# EAGLE board Full Side Panel V4 - Notched (EAGLE 7.3.0)
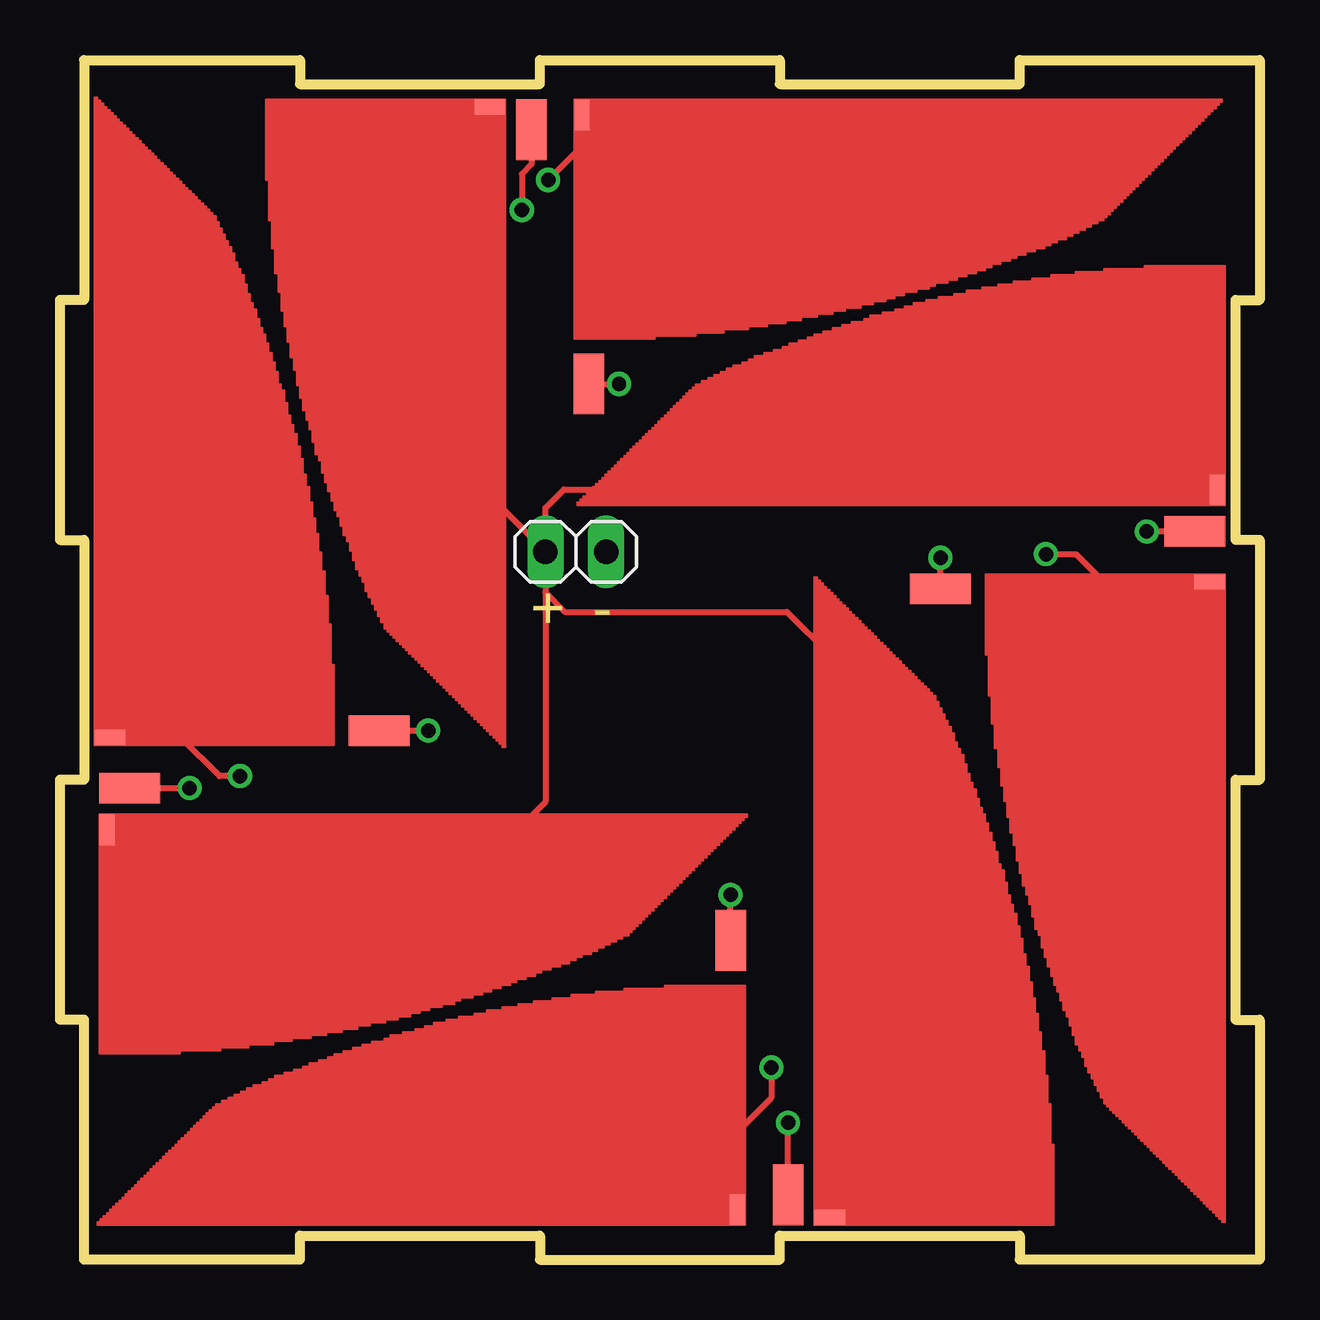
[diagram p0: board, top side]
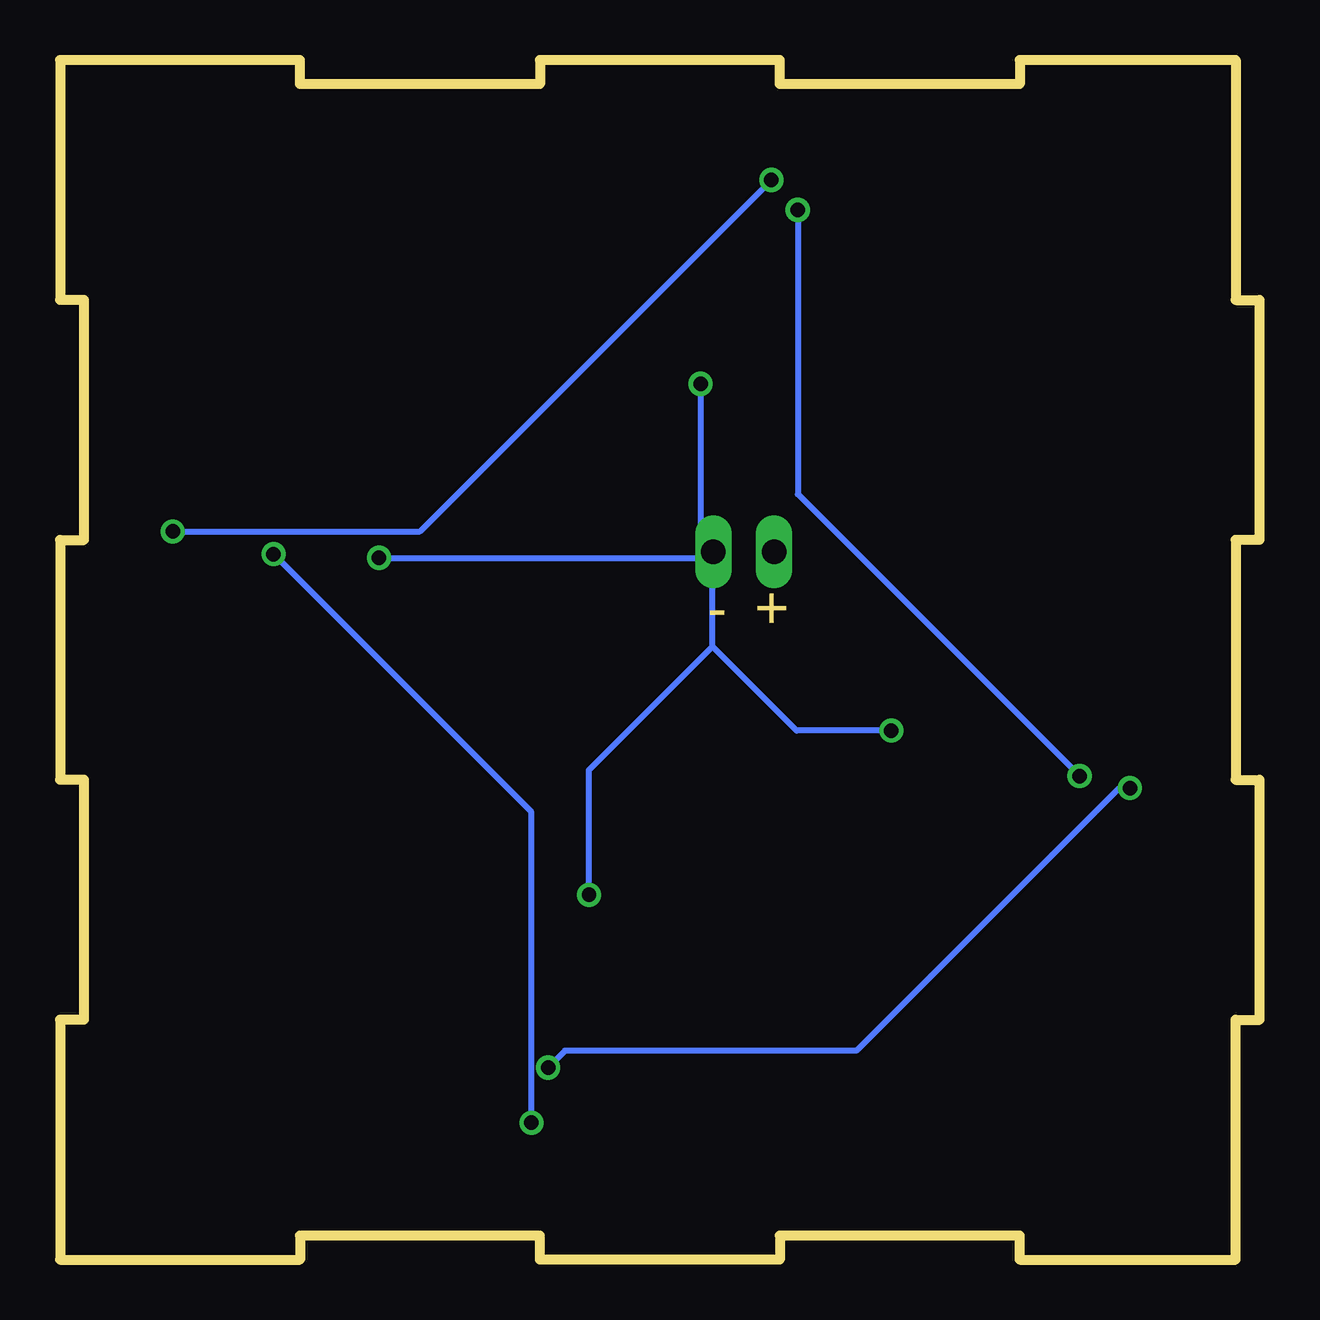
[diagram p1: board, bottom side, seen from below]

Size 50 x 50 mm. Coordinates in mm from the lower left corner, seen from the top.
Outline: 0,10 0,20 1,20 1,30 0,30 0,40 1,40 1,50 10,50 10,49 20,49 20,50 30,50 30,49 40,49 40,50 50,50 50,40 49,40 49,30 50,30 50,20 49,20 49,10 50,10 50,0 40,0 40,1 30,1 30,0 20,0 20,1 10,1 10,0 1,0 1,10 0,10
Copper layers (1*16): Top 0.035mm / dielectric 1.5mm / Bottom 0.035mm
Design rules "default": minimum track width 10mil, minimum drill 24mil, track to track 8mil, track to pad 8mil, pad to pad 8mil, via to via 8mil, smd to smd 8mil, copper to edge 40mil, drill to drill 8mil, minimum pad ring 10mil, minimum via ring 8mil, stop-mask expansion 4mil, vias tented up to drill 0mil, thermal gap 10mil

## Footprints (pad centres in the part's own frame; a part is rotated, then mirrored left to right if it is on the bottom)
TRISOLX = smd 1.27 x 0.635: P$1 0.584,0.26
SMD1,27-2,54 = smd 1.27 x 2.54: 1 0,0
1X02 = drill 1.016 long: 1 -1.27,0; 2 1.27,0

## Placement (x,y rotation side)
E$1  [TRISOLX]  18.5,48.3 180 top
E$2  [TRISOLX]  28.5,1.5 90 top
E$3  [TRISOLX]  1.7,18.5 270 top
E$4  [TRISOLX]  48.5,28.5 180 top
E$5  [TRISOLX]  31.5,1.5 0 top
E$6  [TRISOLX]  21.5,48.3 270 top
E$7  [TRISOLX]  48.5,31.5 90 top
E$8  [SMD1,27-2,54]  13.3,22.05 90 top
E$9  [1X02]  21.5,29.5 0 top
E$10  [SMD1,27-2,54]  36.7,27.95 90 top
E$11  [SMD1,27-2,54]  30.35,2.7 180 top
E$12  [SMD1,27-2,54]  22.05,36.5 180 top
E$13  [SMD1,27-2,54]  47.3,30.35 270 top
E$14  [SMD1,27-2,54]  2.9,19.65 270 top
E$15  [SMD1,27-2,54]  27.95,13.3 180 top
E$16  [SMD1,27-2,54]  19.65,47.1 180 top
E$19  [TRISOLX]  1.5,21.5 0 top

## Library data of the parts
E$1-E$7 E$19 = trisolx
E$8 E$10-E$16 = wirepad
E$9 = pinhead

## Nets
S$1: E$1.P$1 E$3.P$1 E$5.P$1 E$7.P$1 E$9.1
S$2: E$6.P$1 E$13.1
S$3: E$8.1 E$9.2 E$10.1 E$12.1 E$15.1
S$4: E$4.P$1 E$11.1
S$5: E$16.1 E$19.P$1
S$6: E$2.P$1 E$14.1

## Tracks (layer width: path | path; a pad name or v marks a point on that pad's centre or on a via)
S$1
  Top 0.254: E$9.1 20.23,31.33 21,32.1 48.23,32.1 E$7.P$1 | E$9.1 20.23,27.82 21.05,27 30.3,27 32.15,25.15 32.15,1.82 E$5.P$1 | E$9.1 20.23,29.52 17.9,31.85 17.9,48.02 E$1.P$1 | E$9.1 20.23,19.08 19,17.85 2.02,17.85 E$3.P$1
S$2  (via drill 0.6)
  Top 0.254: E$13.1 v45.3,30.35 | v20.35,45 21.8,46.45 21.8,47.67 E$6.P$1
  Bottom 0.254: v45.3,30.35 35,30.35 v20.35,45
S$3  (via drill 0.6)
  Top 0.254: E$12.1 v23.3,36.5 | E$10.1 v36.7,29.25 | E$8.1 v15.35,22.05 | E$15.1 v27.95,15.2
  Bottom 0.254: v23.3,36.5 23.3,30.03 E$9.2 | v36.7,29.25 23.02,29.25 E$9.2 | v15.35,22.05 19.3,22.05 22.8,25.55 | 22.8,25.55 22.8,29.47 E$9.2 | v27.95,15.2 27.95,20.4 22.8,25.55
S$4  (via drill 0.6)
  Top 0.254: E$11.1 v30.35,5.7 | v41.1,29.4 42.35,29.4 44.1,27.65 47.33,27.65 E$4.P$1
  Bottom 0.254: v30.35,5.7 30.35,18.65 v41.1,29.4
S$5  (via drill 0.6)
  Top 0.254: E$16.1 19.65,45.65 19.25,45.25 v19.25,43.75 | v7.5,20.15 6.65,20.15 5.05,21.75 2.09,21.75 E$19.P$1
  Bottom 0.254: v19.25,43.75 19.25,31.9 v7.5,20.15
S$6  (via drill 0.6)
  Top 0.254: E$14.1 v5.4,19.65 | v29.65,8 29.65,6.75 28.25,5.35 28.25,2.09 E$2.P$1
  Bottom 0.254: v5.4,19.65 5.85,19.65 16.8,8.7 28.95,8.7 v29.65,8

## Text on the board
Dimension: + | -